# Altium PCB dctr_v1.2.pcbDoc
Units mm, origin at the board's own origin, x right, y up, seen from the top; angles counter-clockwise.
Board outline 186.5 x 105.6 mm, 2 copper layers (Top Layer, Bottom Layer); 25 components, 26 nets, 100 pads, 16 vias.
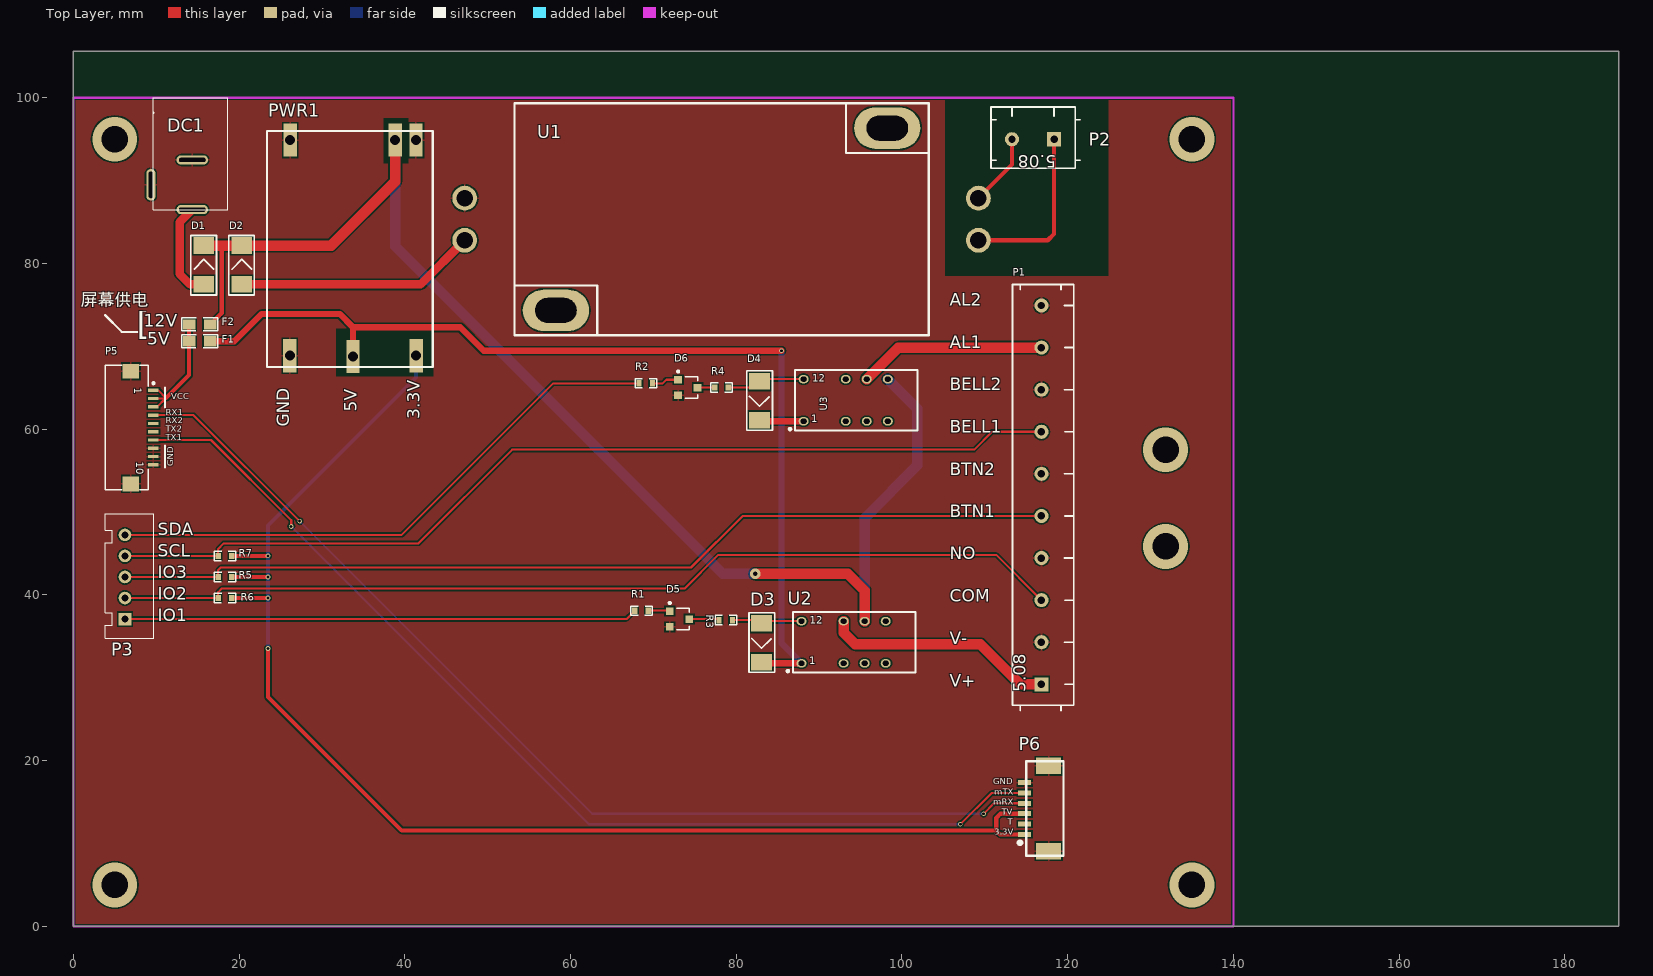
[diagram p0: Top Layer view]
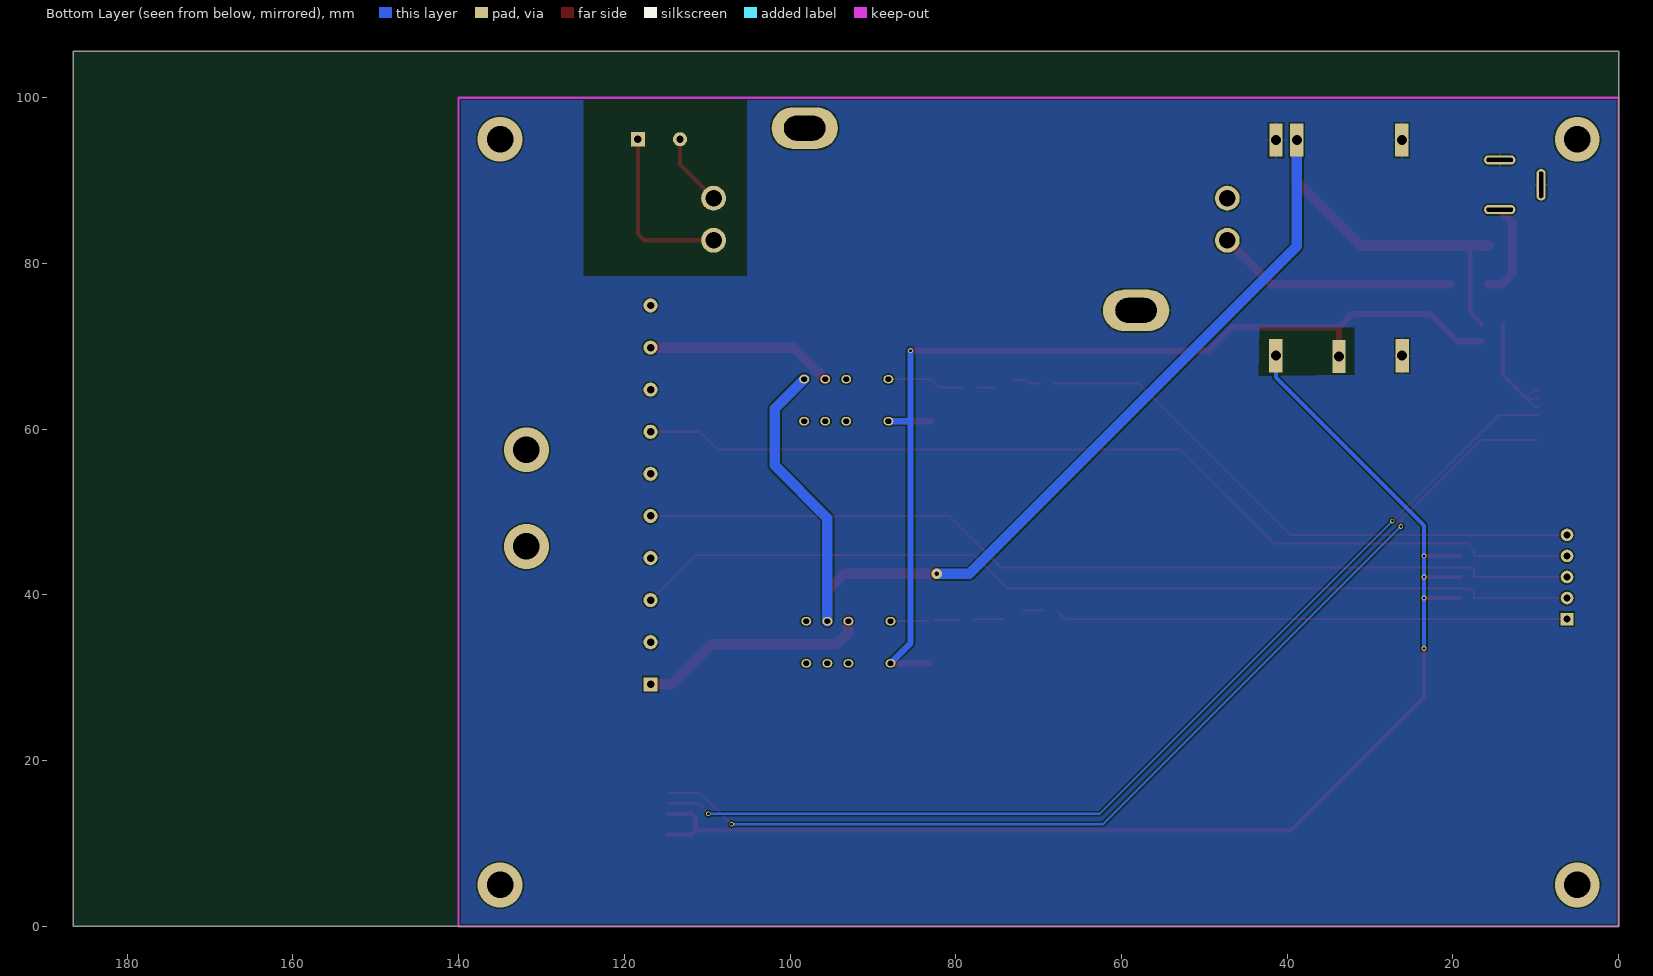
[diagram p1: Bottom Layer view, seen from below]

## Layer stack, top to bottom
Top Layer: signal copper 0.0356
Dielectric: dielectric 0.32, FR-4, Dk 4.8
Bottom Layer: signal copper 0.0356

## Board outline
0,0 186.5,0 186.5,105.6 0,105.6

## Design rules (kind name [scope] priority, off if disabled: settings)
Clearance [All] p1: gap=0.178
ComponentClearance [All] p1: gap=0 collisioncheckmode=3 verticalgap=0 showdistances=FALSE
HoleSize [All] p1: absolutevalues=TRUE maxlimit=25.4 minlimit=0.025 maxpercent=80.000 minpercent=20.000
HoleToHoleClearance [All] p1: gap=0.178 allowstackedmicrovias=TRUE
MinimumSolderMaskSliver [All] p1: minsoldermaskwidth=0
PolygonConnect [All] p1: connectstyle=Relief reliefconductorwidth=0.254 reliefentries=4 polygonreliefangle="90 Angle"
RoomDefinition MCU [InComponentClass('MCU')] p1: confinementstyle=ConfineIn formatcopy=TRUE lockcomponents=FALSE outline -25.4,-25.4 25.4,-25.4 25.4,0 -25.4,0
RoutingVias [All] p1: holewidth=0.356 width=0.559 viastyle="Through Hole" minholewidth=0.356 minwidth=0.559 maxholewidth=7.112 maxwidth=12.7
SilkToSilkClearance [All] p1: silktosilkclearance=0
SilkscreenOverComponentPads [All] p1: minsilkscreentomaskgap=0
SolderMaskExpansion [All] p1: expansion=0.102
TestPointUsage [All] p1: valid=0 allowmultiple=FALSE
Testpoint [All] p1: side=15 testpointundercomponent=TRUE minsize=1.016 maxsize=2.54 preferedsize=1.524 minholesize=0 maxholesize=1.016 preferedholesize=0.813 testpointgrid=0.025 style=1023 order=0123456789
Width [All] p1: maxlimit=2.54 minlimit=0.178 preferedwidth=0.178
18 further rules are at their usual default settings.

## Components (designator, comment, footprint, x,y, rotation, side; value= is the part's Value field where it differs from the comment)
D1 "D-Z" DO-214AC(SMA) 17.272,76.2 r90 top
D2 "D-Z" DO-214AC(SMA) 21.844,76.2 r90 top
D3 "D-S" DO-214AC(SMA) 81.534,37.846 r270 top
D4 "D-S" DO-214AC(SMA) 81.28,67.056 r270 top
D5 "AO3400A" SOT23A 73.152,37.084 r270 top
D6 "AO3400A" SOT23A 74.168,65.024 r270 top
DC1 "DC" DC005 9.652,100 r270 top
F1 "FUSE" 0805F 15.24,70.612 r180 top
F2 "FUSE" 0805F 15.24,72.644 r180 top
P1 "Header 10" KF128-5.08-10 116.84,52.07 r90 top
P2 "Header 2" KF128-5.08-2 115.824,94.996 r180 top
P3 "Header 5" XH2.54-5 6.223,42.164 r90 top
P5 "Header 12" FFC/SM1.0-2H10 9.652,60.198 r270 top
P6 "Header 8" FPC/1.25T-6P 114.808,14.224 r90 top
PWR1 "PWR-1" PWR-1 23.368,96.012 r270 top
R1 "10K" 0603R 68.58,38.1 r180 top
R2 "10K" 0603R 69.088,65.532 r180 top
R3 "10K" 0603R 78.74,36.957 r180 top
R4 "10K" 0603R 78.232,65.024 r180 top
R5 "10K" 0603R 18.288,42.164 r0 top
R6 "10K" 0603R 18.288,39.624 r0 top
R7 "10K" 0603R 18.288,44.704 r0 top
U1 "ACDC" ACDC 78.232,85.344 r180 top
U2 "JDQ(G6S-2)" JDQ-G6S-2 94.234,34.29 r0 top
U3 "JDQ(G6S-2)" JDQ-G6S-2 94.488,63.5 r0 top

## Footprints (in the part's own frame and the unit in brackets; to place one, negate y for a bottom-side part, rotate by r counter-clockwise, add the part's x,y. Pads: shape width x height; smd on the part's side, far side on the other; paste and mask are expansions set on the pad)
0603R [mil]
  rect 25x30 smd: 1(-32,0) 2(32,0)
  silkscreen extent -51,-22 51,22
0805F [mm]
  rect 1.524x1.25 smd: 1(-1.27,0) 2(1.27,0)
  silkscreen extent -2.21,-0.79 2.18,0.79
ACDC [mm] "AC-DC 电源模块（MK-2236）"
  oval 8x5 hole 3 slot 5 at 0 deg: 0(-20,-11) 0(20,11)
  round 3 hole 2: 1(-31,2.54) 2(-31,-2.54) 3(31,-2.54) 4(31,2.54)
  silkscreen extent -25,-14 25,14
DC005 [mm] "9*13.5*10( 外径5.5mm 内径2.1mm)"
  oval 1.1x3.8 hole 0.5 slot 3.2 at 90 deg: 1(13.5,4.7) 2(7.5,4.7)
  oval 3.8x1.1 hole 0.5 slot 3.2 at 0 deg: 3(10.5,-0.3)
  silkscreen extent 0,0 13.5,9
DO-214AC(SMA) [mm]
  rect 2x2.5 smd: A(1.27,1.524) K(5.969,1.524)
  silkscreen extent 0,0 7.19,3.1
FFC/SM1.0-2H10 [mm] "Connector; FH12 Series; 6 Position; 1.0mm Spaced Bottom Eccentric Contact"
  rect 0.4x1.25 smd: 1(-4.5,0) 2(-3.5,0) 3(-2.5,0) 4(-1.5,0) 5(-0.5,0) 6(0.5,0) 7(1.5,0) 8(2.5,0) 9(3.5,0) 10(4.5,0)
  rect 1.8x2 smd: 11(-6.8,-2.725) 12(6.8,-2.725)
  silkscreen extent -7.5,-5.82 7.5,0.13
FPC/1.25T-6P [mm]
  rect 0.6x1.6 smd: 1(-3.125,0) 2(-1.875,0) 3(-0.625,0) 4(0.625,0) 5(1.875,0) 6(3.125,0)
  rect 2x3 smd: 7(-5.15,-2.9) 8(5.15,-2.9)
  silkscreen extent -5.7,-4.7 5.7,0.71
JDQ-G6S-2 [mm] "继电器（G6S-2） 5VDC"
  oval 1.2x1 hole 0.6 slot 0.7 at 0 deg: 1(-6.35,-2.54) 3(-1.27,-2.54) 4(1.27,-2.54) 5(3.81,-2.54) 8(3.81,2.54) 9(1.27,2.54) 10(-1.27,2.54) 12(-6.35,2.54)
  silkscreen extent -8.14,-3.65 7.4,3.65
KF128-5.08-2 [mm]
  rect 1.7x1.7 hole 0.9: 1(-2.54,0)
  round 1.7 hole 0.9: 2(2.54,0)
  silkscreen extent -5.72,-3.9 5.08,3.5
KF128-5.08-10 [mm]
  rect 1.7x1.7 hole 0.9: 1(-22.86,0)
  round 1.7 hole 0.9: 2(-17.78,0) 3(-12.7,0) 4(-7.62,0) 5(-2.54,0) 6(2.54,0) 7(7.62,0) 8(12.7,0) 9(17.78,0) 10(22.86,0)
  silkscreen extent -26.06,-3.9 25.4,3.5
PWR-1 [mm]
  rect 4x1.6 hole 1.2: 1(1.125,17.975) 2(1.125,15.475) 3(1.125,2.8) 4(27.141,2.76) 5(27.225,10.38) 6(27.141,18)
  silkscreen extent 0,0 28.5,20
SOT23A [mm] "SOT-23; 3 Leads; Body 3.0 x 2.5 mm, inc. leads (LxW max)"
  rect 0.9x0.95 smd: 1(-0.95,-1.175) 2(0.95,-1.175) 3(0,1.175)
  silkscreen extent -2.07,-1.3 1.3,1.18
XH2.54-5 [mil]
  rect 60x60 hole 32: 1(-200,0)
  round 60 hole 32: 2(-100,0) 3(0,0) 4(100,0) 5(200,0)
  silkscreen extent -292,-136 301,94

## Part data
D1: library part D-S, "肖特基二极管"
D2: "稳压二极管"
D3 D4: "肖特基二极管"
D5 D6: library part MOS-N, "NMOS"
DC1: library part DC00X, "圆形电源接口"
F1 F2: "CR-1812-050A60V"
P1: "Header, 10-Pin"
P2: "Header, 2-Pin"
P3: "Header, 5-Pin"
P5: "Header, 12-Pin"
P6: "Header, 8-Pin"
R1 R2 R3 R4 R5 R6 R7: library part RES, "普通电阻"
U1: library part ACDC12
U2 U3: "继电器（G6S-2 5VDC）"

## Via types
v1: diameter 0.559, hole 0.356, Top Layer to Bottom Layer, tented both sides, 9 vias
v2: diameter 5.4, hole 3.2, Top Layer to Bottom Layer, tented both sides, 6 vias
v3: diameter 1.27, hole 0.559, Top Layer to Bottom Layer, tented both sides, 1 vias

## Nets (pads, with @x,y where several pads share a name; then routed paths per layer and width w, separated by ;. In a path a pad name is that pad's centre, name@x,y a point inside that pad or via, vN(x,y) a via of type N, cw(c..) or ccw(c..) an arc to the next point about the centre after c; other vN are vias at no path point)
AL1: P1.9 U3.9 | length 22.7
  Top Layer w1.27: U3.9 99.568,69.85 P1.9
BELL1: P1.7 P3.4 R7.1 | length 117.3
  Top Layer w0.254: P3.4 R7.1 17.475,45.542 18.161,46.228 41.656,46.228 52.959,57.531 108.712,57.531 110.871,59.69 P1.7
BTN1: P1.5 P3.3 R5.1 | length 114.2
  Top Layer w0.254: P3.3 R5.1 17.475,43.002 17.78,43.307 74.549,43.307 80.772,49.53 P1.5
D3V3: P6.1 P6.3 PWR1.6 R5.2 R6.2 R7.2 | length 165.1
  Top Layer w0.508: R6.2 v1(23.495,39.624) ; R5.2 v1(23.495,42.164) ; R7.2 v1(23.495,44.704) ; v1(23.495,33.528) 23.495,27.686 39.624,11.557 111.379,11.557 ; P6.1 111.837,11.099 111.379,11.557 ; P6.3 111.897,13.599 111.379,13.081 111.379,11.557
  Bottom Layer w0.508: v1(23.495,33.528) 23.495,48.387 41.368,66.26 PWR1.6
D5V: D3.K D4.K F1.1 PWR1.5 U2.1 U3.1 | length 127
  Top Layer w0.762: F1.1 19.431,70.612 22.733,73.914 32.131,73.914 33.748,72.297 ; PWR1.5 33.748,72.297 ; D4.K@82.931,60.96 U3.1 ; D3.K@83.185,31.75 U2.1 ; v1(85.471,69.469) 49.53,69.469 46.702,72.297 33.748,72.297
  Bottom Layer w0.762: v1(85.471,69.469) 85.471,60.96 ; U2.1 85.471,34.163 85.471,60.96 ; U3.1 85.471,60.96
D12V: D1.K D2.K F2.1 PWR1.2 U2.9 U3.8 | length 165.1
  Top Layer w0.508: F2.1 17.907,74.041 17.907,82.169
  Top Layer w1.27: D1.K 17.907,82.169 D2.K 31.115,82.169 38.843,89.897 PWR1.2 ; v3(82.296,42.545) 93.472,42.545 95.504,40.513 U2.9
  Bottom Layer w1.27: PWR1.2 38.843,82.061 78.359,42.545 v3(82.296,42.545) ; U2.9 95.504,49.276 101.854,55.626 101.854,62.484 U3.8
GND: D5.2 D6.2 DC1.2 DC1.3 P1.2 P1.4 P1.6 P1.8 P1.10 P5.8 P5.9 P5.10 P5.11 P5.12 P6.6 P6.7 P6.8 PWR1.1 PWR1.3 PWR1.4 U1.3
IO1: P3.1 R1.2 | length 62
  Top Layer w0.254: P3.1 66.751,37.084 R1.2
IO2: P1.3 P3.2 R6.1 | length 115.5
  Top Layer w0.254: P3.2 R6.1 17.475,40.335 17.907,40.767 73.787,40.767 77.851,44.831 111.379,44.831 P1.3
LOCK_V+: P1.1 U2.10 | length 27.9
  Top Layer w1.27: U2.10 92.964,35.433 94.361,34.036 109.474,34.036 114.3,29.21 P1.1
NetD1_A: D1.A DC1.1 | length 11.8
  Top Layer w1.016: DC1.1 12.827,84.975 12.827,78.74 14.097,77.47 D1.A
NetD2_A: D2.A U1.4 | length 29.1
  Top Layer w1.016: D2.A 41.898,77.47 U1.4
NetD3_A: D3.A R3.1 U2.12 | length 7.7
  Top Layer w0.254: R3.1 D3.A@82.677,36.957 ; D3.A@83.312,36.83 U2.12
NetD4_A: D4.A R4.1 U3.12 | length 9.5
  Top Layer w0.254: R4.1 82.042,65.024 83.058,66.04 U3.12
NetD5_1: D5.1 R1.1 | length 2.5
  Top Layer w0.254: R1.1 D5.1@71.911,38.1
NetD5_3: D5.3 R3.2 | length 3.7
  Top Layer w0.254: D5.3 77.8,37.084 R3.2
NetD6_1: D6.1 R2.1 | length 3.3
  Top Layer w0.254: R2.1 71.12,65.532 71.562,65.974 D6.1
NetD6_3: D6.3 R4.2 | length 2.1
  Top Layer w0.254: D6.3 R4.2
NetF1_2: F1.2 F2.2 P5.1 P5.2 P5.3 | length 15.3
  Top Layer w0.254: P5.3 10.12,62.698 11.12,63.698 P5.2 ; P5.1 10.232,64.698 11.176,63.754
  Top Layer w0.508: 11.176,63.754 13.97,66.548 F1.2 F2.2
NetP2_1: P2.1 U1.1 | length 20.9
  Top Layer w0.508: U1.1 117.602,82.804 118.364,83.566 P2.1
NetP2_2: P2.2 U1.2 | length 8.8
  Top Layer w0.508: U1.2 113.284,91.936 P2.2
RX1: P5.4 P6.4 | length 125.6
  Top Layer w0.254: P5.4 14.502,61.698 v1(27.305,48.895) ; v1(109.855,13.589) 111.115,14.849 P6.4
  Bottom Layer w0.254: v1(27.305,48.895) 62.611,13.589 v1(109.855,13.589)
RX2: P5.5
SDA: P3.5 R2.2 | length 69.6
  Top Layer w0.254: P3.5 39.624,47.244 57.912,65.532 R2.2
TX1: P5.7 P6.5 | length 126.4
  Top Layer w0.254: P5.7 16.613,58.698 26.289,49.022 v1(26.289,48.26) ; v1(107.061,12.319) 110.841,16.099 P6.5
  Bottom Layer w0.254: v1(26.289,48.26) 62.23,12.319 v1(107.061,12.319)
TX2: P5.6
pads on no net: P6.2 U1.0 U2.3 U2.4 U2.5 U2.8 U3.3 U3.4 U3.5 U3.10
copper on no net:
  other v2: 5,5 135,5 131.826,45.847 131.826,57.531 5,95 135,95

## Polygon pours and split planes (outlines as drawn)
GND on Top Layer "Keep-Out Layer-No Net" (solid, remove dead copper, pour order 1000): 140,100 140,0 0,0 0,100
GND on Bottom Layer "Keep-Out Layer-No Net" (solid, remove dead copper, pour order 1001): 0,100 140,100 140,0 0,0

## Keep-outs
Keep-Out Layer:
  lines w0.254: 0,0 0,100 140,100 140,0 0,0

## Other copper
Top Layer:
  pour cut-out: 105.156,78.486 124.968,78.486 124.968,100 105.156,100
  pour cut-out: 31.75,72.136 43.273,72.263 43.307,72.297 43.434,66.421 31.75,66.421
  pour cut-out: 37.465,97.536 40.386,97.536 40.386,92.73 40.365,92.709 40.386,92.688 40.386,92.075 37.465,92.075
Bottom Layer:
  pour cut-out: 105.156,78.486 124.968,78.486 124.968,100 105.156,100
  pour cut-out: 31.877,72.263 43.273,72.263 43.307,72.297 43.434,66.421 31.877,66.548

## Silkscreen, mask and mechanical layers (free items; w line width, h text height)
Top Overlay:
  lines w0.254: 3.81,73.787 5.842,71.755 7.747,71.755 ; 11.049,55.372 11.049,58.039 ; 11.049,62.611 11.049,65.024
  text "屏幕供电" at 0.889,74.422 h2.54
  text "AL2" at 105.791,74.422 h2.54
  text "12V" at 8.509,71.882 h2.54
  text "[" at 7.62,70.485 h5.08
  text "5V" at 8.89,69.723 h2.54
  text "AL1" at 105.791,69.314 h2.54
  text "BELL2" at 105.791,64.206 h2.54
  text "VCC" at 11.811,63.373 h1.27
  text "5V" at 34.671,62.103 h2.54 r90
  text "RX1" at 11.176,61.468 h1.27
  text "3.3V" at 42.291,61.214 h2.54 r90
  text "RX2" at 11.176,60.452 h1.27
  text "GND" at 26.543,60.325 h2.54 r90
  text "TX2" at 11.176,59.436 h1.27
  text "BELL1" at 105.791,59.097 h2.54
  text "TX1" at 11.176,58.42 h1.27
  text "GND" at 12.319,55.499 h1.27 r90
  text "BTN2" at 105.791,53.989 h2.54
  text "BTN1" at 105.791,48.881 h2.54
  text "SDA" at 10.16,46.736 h2.54
  text "SCL" at 10.16,44.133 h2.54
  text "NO" at 105.791,43.8 h2.54
  text "IO3" at 10.16,41.529 h2.54
  text "IO2" at 10.16,38.925 h2.54
  text "COM" at 105.791,38.692 h2.54
  text "IO1" at 10.16,36.322 h2.54
  text "V-" at 105.793,33.556 h2.54
  text "V+" at 105.793,28.448 h2.54
  text "GND" at 111.039,16.891 h1.27
  text "mTX" at 111.125,15.658 h1.27
  text "mRX" at 110.999,14.439 h1.27
  text "TV" at 112.027,13.22 h1.27
  text "T" at 112.8,12.001 h1.27
  text "3.3V" at 111.162,10.795 h1.27

## Text inside footprints (layer, text, board x,y; h text height)
P1: Top Overlay "5.08" at 115.44,28.27 h2.54 r90
P2: Top Overlay "5.08" at 118.624,93.546 h2.54 r180
P5: Top Overlay "10" at 7.277,56.098 h1.5 r270; Top Overlay "1" at 7.044,65.024 h1.5 r270
U2: Top Overlay "1" at 88.824,31.318 h1.52; Top Overlay "12" at 88.9,36.22 h1.52
U3: Top Overlay "12" at 89.154,65.43 h1.52; Top Overlay "1" at 89.078,60.528 h1.52